# EAGLE board Main_DMB-4773-opto-v2 (EAGLE 6.5.0)
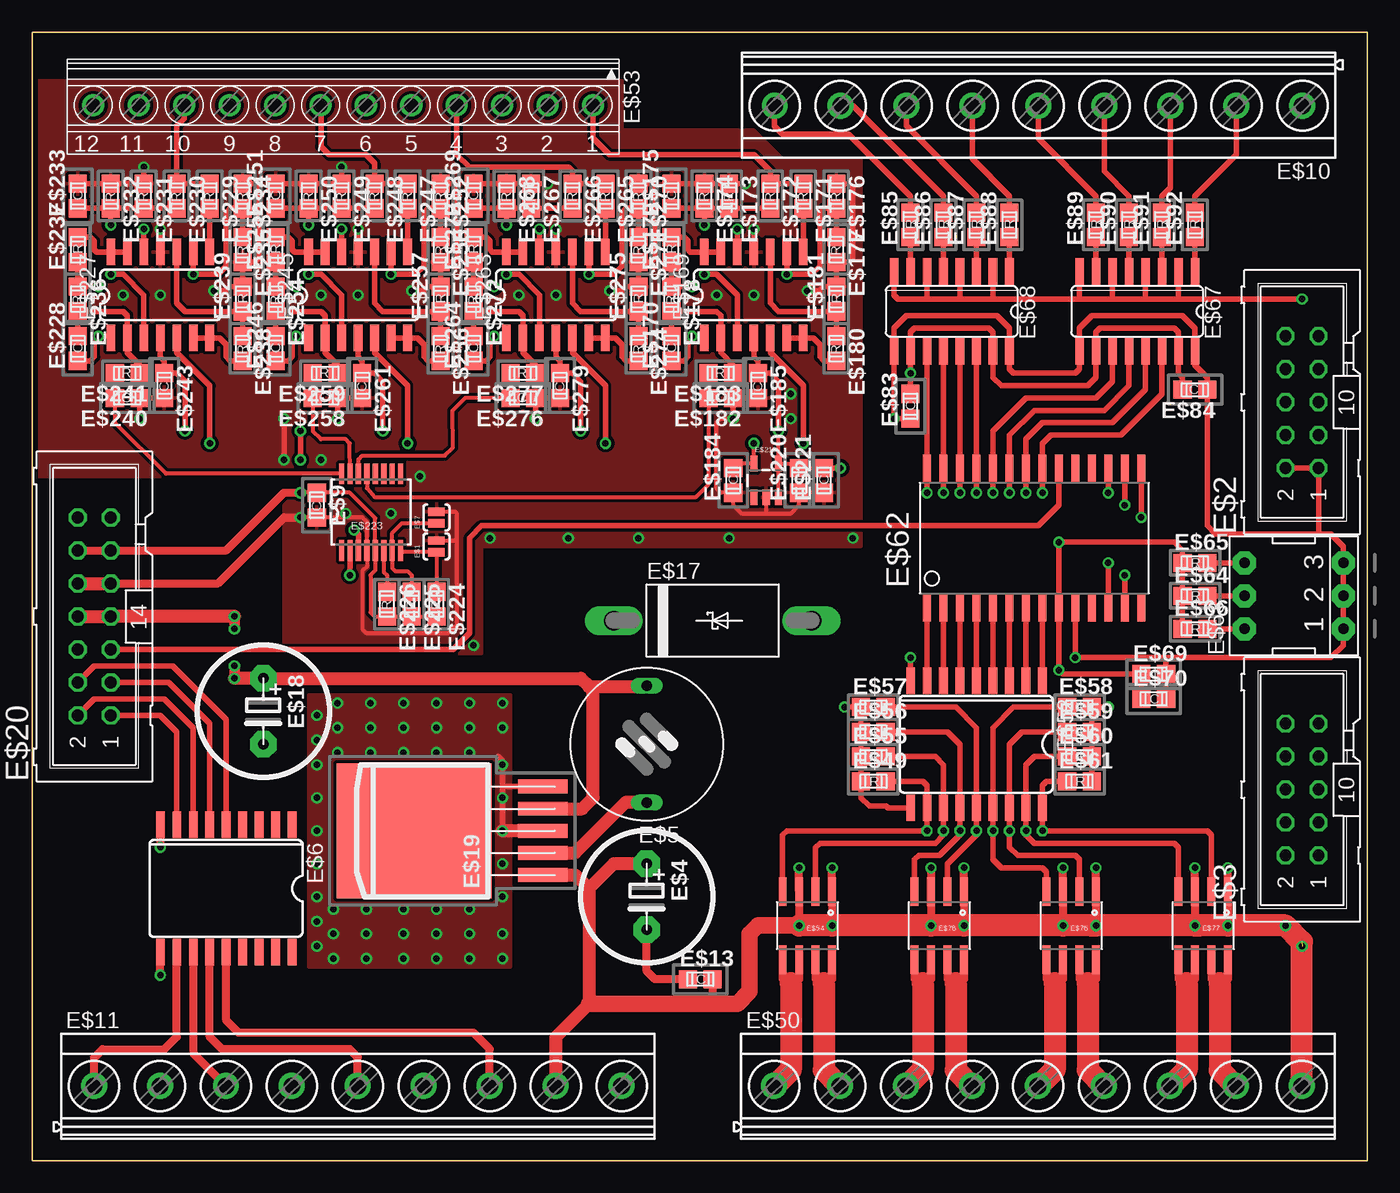
[diagram p0: board, top side]
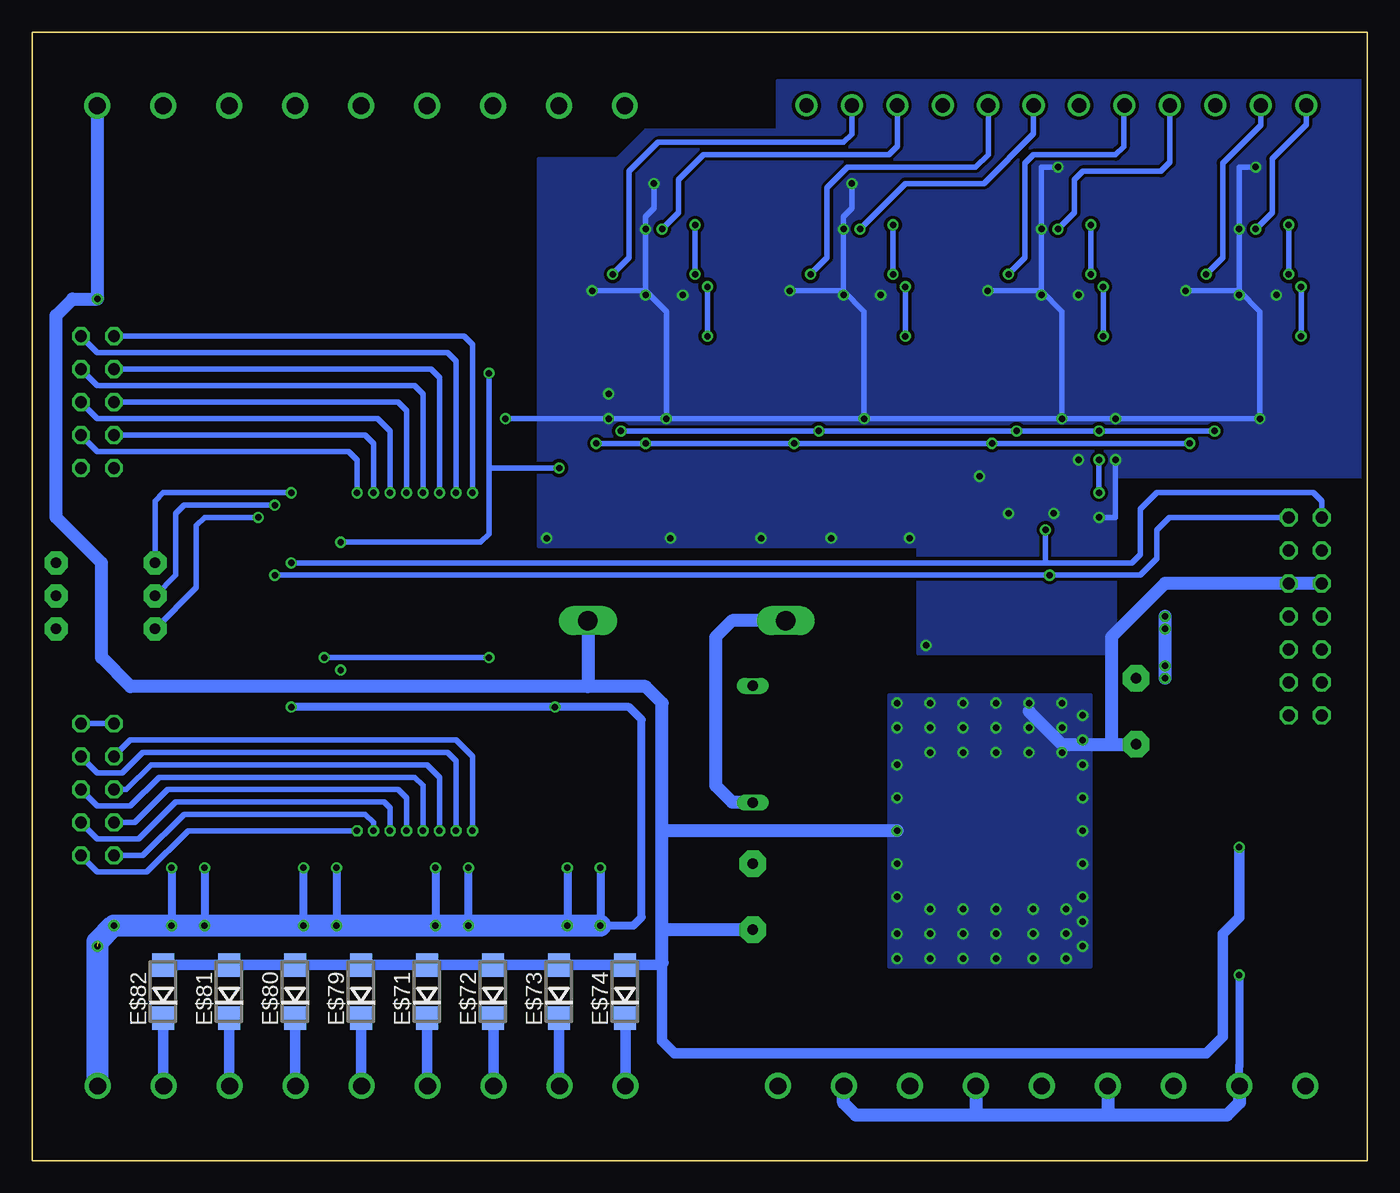
[diagram p1: board, bottom side, seen from below]

Size 102.79 x 86.89 mm. Coordinates in mm from the lower left corner, seen from the top.
Outline: 0,86.89 102.79,86.89 102.79,0 0,0 0,86.89
Copper layers (1*16): Top 0.0356mm / dielectric 1.5011mm / Bottom 0.0356mm
Design rules "LaenPCBOrder": minimum track width 6mil, minimum drill 13mil, track to track 6mil, track to pad 6mil, pad to pad 6mil, via to via 6mil, smd to smd 6mil, copper to edge 15mil, drill to drill 6mil, minimum pad ring 7mil, minimum via ring 7mil, stop-mask expansion 3mil, vias tented up to drill 0mil, thermal gap 10mil

## Footprints (pad centres in the part's own frame; a part is rotated, then mirrored left to right if it is on the bottom)
SJ_2S-NO = smd 0.635 x 1.27: 1 -0.45,0; 2 0.45,0
ML10 = drill 0.914 octagon: 1 -5.08,-1.27; 2 -5.08,1.27; 3 -2.54,-1.27; 4 -2.54,1.27; 5 0,-1.27; 6 0,1.27; 7 2.54,-1.27; 8 2.54,1.27; 9 5.08,-1.27; 10 5.08,1.27
CE02A = drill 0.813 pad 2.032 octagon: + -2.54,0; - 2.54,0
RLB1314 = drill 0.813 long: 1 0,4.496; 2 0,-4.496
SO18L = smd 0.66 x 2.032: 1 -0.635,-4.902; 2 0.635,-4.902; 3 1.905,-4.902; 4 3.175,-4.902; 5 4.445,-4.902; 6 5.715,-4.902; 7 6.985,-4.902; 8 8.255,-4.902; 9 9.525,-4.902; 10 9.525,4.902; 11 8.255,4.902; 12 6.985,4.902; 13 5.715,4.902; 14 4.445,4.902; 15 3.175,4.902; 16 1.905,4.902; 17 0.635,4.902; 18 -0.635,4.902
C0805 = smd 1.397 x 1.397: 1 -0.953,0; 2 0.953,0
MKDSN1,5/9-5,08 = drill 1.3 pad 2: 1 -20.341,0.025; 2 -15.261,0.025; 3 -10.181,0.025; 4 -5.101,0.025; 5 -0.021,0.025; 6 5.059,0.025; 7 10.139,0.025; 8 15.219,0.025; 9 20.299,0.025
DO201T15 = drill 1.499 long: A 7.62,0; C -7.62,0
TO263-5 = smd 1.067 x 3.81: 1 -3.404,0.056; 2 -1.702,0.056; 3 0,0.056; 4 1.702,0.056; 5 3.404,0.056 | smd 10.414 x 11.938: CASE 0,9.975
ML14 = drill 0.914 octagon: 1 -7.62,-1.27; 2 -7.62,1.27; 3 -5.08,-1.27; 4 -5.08,1.27; 5 -2.54,-1.27; 6 -2.54,1.27; 7 0,-1.27; 8 0,1.27; 9 2.54,-1.27; 10 2.54,1.27; 11 5.08,-1.27; 12 5.08,1.27; 13 7.62,-1.27; 14 7.62,1.27
R0805 = smd 1.397 x 1.397: 1 -0.953,0; 2 0.953,0
175317 = drill 1.1 pad 1.7: 1 -13.973,0; 2 -10.473,0; 3 -6.973,0; 4 -3.473,0; 5 0.028,0; 6 3.527,0; 7 7.027,0; 8 10.527,0; 9 14.027,0; 19 17.527,0; 20 21.027,0; 21 24.527,0
SOIC8 = smd 0.61 x 2.21: 1 -1.905,-2.616; 2 -0.635,-2.616; 3 0.635,-2.616; 4 1.905,-2.616; 5 1.905,2.616; 6 0.635,2.616; 7 -0.635,2.616; 8 -1.905,2.616
SO28-3 = smd 0.61 x 2.21: 1 -8.255,-5.315; 2 -6.985,-5.315; 3 -5.715,-5.315; 4 -4.445,-5.315; 5 -3.175,-5.315; 6 -1.905,-5.315; 7 -0.635,-5.315; 8 0.635,-5.315; 9 1.905,-5.315; 10 3.175,-5.315; 11 4.445,-5.315; 12 5.715,-5.315; 13 6.985,-5.315; 14 8.255,-5.315; 15 8.255,5.315; 16 6.985,5.315; 17 5.715,5.315; 18 4.445,5.315; 19 3.175,5.315; 20 1.905,5.315; 21 0.635,5.315; 22 -0.635,5.315; 23 -1.905,5.315; 24 -3.175,5.315; 25 -4.445,5.315; 26 -5.715,5.315; 27 -6.985,5.315; 28 -8.255,5.315
EPG-03-SMALL = drill 0.813 pad 1.778 octagon: 1 -2.54,-3.81; 2 0,-3.81; 3 2.54,-3.81; 4 2.54,3.81; 5 0,3.81; 6 -2.54,3.81
SO16 = smd 0.66 x 2.032: 1 -4.445,-3.073; 2 -3.175,-3.073; 3 -1.905,-3.073; 4 -0.635,-3.073; 5 0.635,-3.073; 6 1.905,-3.073; 7 3.175,-3.073; 8 4.445,-3.073; 9 4.445,3.073; 10 3.175,3.073; 11 1.905,3.073; 12 0.635,3.073; 13 -0.635,3.073; 14 -1.905,3.073; 15 -3.175,3.073; 16 -4.445,3.073
DO214AC = smd 1.8 x 1.7: A 2.05,0; C -2.05,0
SOIC-14 = smd 0.66 x 2.032: 1 -4.445,-3.315; 2 -3.175,-3.315; 3 -1.905,-3.315; 4 -0.635,-3.315; 5 0.635,-3.315; 6 1.905,-3.315; 7 3.175,-3.315; 8 3.175,3.315; 9 1.905,3.315; 10 0.635,3.315; 11 -0.635,3.315; 12 -1.905,3.315; 13 -3.175,3.315; 14 -4.445,3.315
SOT23-5 = smd 0.55 x 1.2: 1 -0.95,-1.3; 2 0,-1.3; 3 0.95,-1.3; 4 0.95,1.3; 5 -0.95,1.3
TSSOP16 = smd 0.4 x 1.6: 1 -2.225,-2.85; 2 -1.575,-2.85; 3 -0.925,-2.85; 4 -0.275,-2.85; 5 0.375,-2.85; 6 1.025,-2.85; 7 1.675,-2.85; 8 2.325,-2.85; 9 2.325,3.05; 10 1.675,3.05; 11 1.025,3.05; 12 0.375,3.05; 13 -0.275,3.05; 14 -0.925,3.05; 15 -1.575,3.05; 16 -2.225,3.05

## Placement (x,y rotation side)
E$1  [SJ_2S-NO]  31.11,47.31 90 top
E$2  [ML10]  97.79,58.42 90 top
E$3  [ML10]  97.79,28.57 90 top
E$4  [CE02A]  47.31,20.32 270 top
E$5  [RLB1314]  47.31,32.07 180 top
E$6  ULN2803  [SO18L]  19.37,20.95 180 top
E$7  [SJ_2S-NO]  31.11,49.53 90 top
E$9  100n  [C0805]  21.91,50.48 270 top
E$10  [MKDSN1,5/9-5,08]  77.47,81.28 180 top
E$11  [MKDSN1,5/9-5,08]  25.08,5.71 0 top
E$13  100n  [C0805]  51.44,13.97 0 top
E$17  [DO201T15]  52.39,41.59 0 top
E$18  [CE02A]  17.78,34.61 270 top
E$19  [TO263-5]  39.37,25.4 90 top
E$20  [ML14]  4.76,41.91 90 top
E$49  10K  [R0805]  64.77,29.21 0 top
E$50  [MKDSN1,5/9-5,08]  77.47,5.71 0 top
E$52  ULN2803  [SO18L]  77.15,32.07 180 top
E$53  [175317]  29.21,81.28 180 top
E$54  [SOIC8]  59.69,18.1 180 top
E$55  10K  [R0805]  64.77,31.11 0 top
E$56  10K  [R0805]  64.77,33.02 0 top
E$57  10K  [R0805]  64.77,34.92 0 top
E$58  10K  [R0805]  80.64,34.92 0 top
E$59  10K  [R0805]  80.64,33.02 0 top
E$60  10K  [R0805]  80.64,31.11 0 top
E$61  10K  [R0805]  80.64,29.21 0 top
E$62  MCP23017  [SO28-3]  77.15,47.94 0 top
E$63  [EPG-03-SMALL]  97.16,43.5 90 top
E$64  10K  [R0805]  89.53,43.5 0 top
E$65  10K  [R0805]  89.53,46.04 0 top
E$66  10K  [R0805]  89.53,40.96 0 top
E$67  ACSL-6400  [SO16]  85.09,65.41 180 top
E$68  ACSL-6400  [SO16]  70.8,65.41 180 top
E$69  100n  [C0805]  86.36,37.47 0 top
E$70  1u  [C0805]  86.36,35.56 0 top
E$71  [DO214AC]  72.39,13.02 90 bottom
E$72  [DO214AC]  67.31,13.02 90 bottom
E$73  [DO214AC]  62.23,13.02 90 bottom
E$74  [DO214AC]  57.15,13.02 90 bottom
E$76  [SOIC8]  80.01,18.1 180 top
E$77  [SOIC8]  90.17,18.1 180 top
E$78  [SOIC8]  69.85,18.1 180 top
E$79  [DO214AC]  77.47,13.02 90 bottom
E$80  [DO214AC]  82.55,13.02 90 bottom
E$81  [DO214AC]  87.63,13.02 90 bottom
E$82  [DO214AC]  92.71,13.02 90 bottom
E$83  100n  [C0805]  67.63,58.1 90 top
E$84  100n  [C0805]  89.53,59.37 180 top
E$85  1.30K  [R0805]  67.63,72.07 90 top
E$86  1.30K  [R0805]  70.17,72.07 90 top
E$87  1.30K  [R0805]  72.71,72.07 90 top
E$88  1.30K  [R0805]  75.25,72.07 90 top
E$89  1.30K  [R0805]  81.92,72.07 90 top
E$90  1.30K  [R0805]  84.45,72.07 90 top
E$91  1.30K  [R0805]  87,72.07 90 top
E$92  1.30K  [R0805]  89.53,72.07 90 top
E$169  [SOIC-14]  56.2,66.67 0 top
E$170  0.1  [C0805]  49.21,62.55 90 top
E$171  1K  [R0805]  59.37,74.3 270 top
E$172  2K  [R0805]  56.83,74.3 270 top
E$173  2K  [R0805]  53.66,74.3 270 top
E$174  39.2K  [R0805]  51.75,74.3 270 top
E$175  0.1  [C0805]  49.21,74.3 90 top
E$176  1.91K  [R0805]  61.91,74.3 270 top
E$177  100  [R0805]  61.91,70.17 270 top
E$178  39.2K  [R0805]  49.21,66.36 270 top
E$179  1K  [R0805]  49.21,70.17 90 top
E$180  26.7K  [R0805]  61.91,62.55 270 top
E$181  1.1K  [R0805]  61.91,66.36 90 top
E$182  4.7n  [C0805]  53.02,58.74 180 top
E$183  51  [R0805]  53.02,60.64 180 top
E$184  0.1  [C0805]  53.98,52.39 90 top
E$185  0.1  [C0805]  55.88,59.69 270 top
E$219  [SOT23-5]  56.52,52.39 0 top
E$220  0.1  [C0805]  59.05,52.39 90 top
E$221  0.1  [C0805]  60.96,52.39 90 top
E$223  AD5316R  [TSSOP16]  26.04,49.85 0 top
E$224  10K  [R0805]  31.11,42.86 270 top
E$225  10K  [R0805]  29.21,42.86 270 top
E$226  10K  [R0805]  27.3,42.86 270 top
E$227  [SOIC-14]  10.48,66.67 0 top
E$228  0.1  [C0805]  3.49,62.55 90 top
E$229  1K  [R0805]  13.65,74.3 270 top
E$230  2K  [R0805]  11.11,74.3 270 top
E$231  2K  [R0805]  8.57,74.3 270 top
E$232  39.2K  [R0805]  6.03,74.3 270 top
E$233  0.1  [C0805]  3.49,74.3 90 top
E$234  1.91K  [R0805]  16.19,74.3 270 top
E$235  100  [R0805]  16.19,70.17 270 top
E$236  39.2K  [R0805]  3.49,66.36 270 top
E$237  1K  [R0805]  3.49,70.17 90 top
E$238  26.7K  [R0805]  16.19,62.55 270 top
E$239  1.1K  [R0805]  16.19,66.36 90 top
E$240  4.7n  [C0805]  7.3,58.74 180 top
E$241  51  [R0805]  7.3,60.64 180 top
E$243  0.1  [C0805]  10.16,59.69 270 top
E$245  [SOIC-14]  25.72,66.67 0 top
E$246  0.1  [C0805]  18.73,62.55 90 top
E$247  1K  [R0805]  28.89,74.3 270 top
E$248  2K  [R0805]  26.35,74.3 270 top
E$249  2K  [R0805]  23.81,74.3 270 top
E$250  39.2K  [R0805]  21.27,74.3 270 top
E$251  0.1  [C0805]  18.73,74.3 90 top
E$252  1.91K  [R0805]  31.43,74.3 270 top
E$253  100  [R0805]  31.43,70.17 270 top
E$254  39.2K  [R0805]  18.73,66.36 270 top
E$255  1K  [R0805]  18.73,70.17 90 top
E$256  26.7K  [R0805]  31.43,62.55 270 top
E$257  1.1K  [R0805]  31.43,66.36 90 top
E$258  4.7n  [C0805]  22.54,58.74 180 top
E$259  51  [R0805]  22.54,60.64 180 top
E$261  0.1  [C0805]  25.4,59.69 270 top
E$263  [SOIC-14]  40.96,66.67 0 top
E$264  0.1  [C0805]  33.97,62.55 90 top
E$265  1K  [R0805]  44.13,74.3 270 top
E$266  2K  [R0805]  41.59,74.3 270 top
E$267  2K  [R0805]  38.42,74.3 270 top
E$268  39.2K  [R0805]  36.51,74.3 270 top
E$269  0.1  [C0805]  33.97,74.3 90 top
E$270  1.91K  [R0805]  46.67,74.3 270 top
E$271  100  [R0805]  46.67,70.17 270 top
E$272  39.2K  [R0805]  33.97,66.36 270 top
E$273  1K  [R0805]  33.97,70.17 90 top
E$274  26.7K  [R0805]  46.67,62.55 270 top
E$275  1.1K  [R0805]  46.67,66.36 90 top
E$276  4.7n  [C0805]  37.78,58.74 180 top
E$277  51  [R0805]  37.78,60.64 180 top
E$279  0.1  [C0805]  40.64,59.69 270 top

## Library data of the parts
E$1 E$7 = SparkFun-Capacitors
E$2 E$3 E$20 = con-harting-ml
E$4 E$9 E$13 E$18 E$49 E$55-E$61 E$64-E$66 E$69 E$70 E$83-E$92 E$170-E$185 E$220 E$221 E$224-E$226 E$228-E$241 E$243 E$246-E$259 E$261 E$264-E$277 E$279 = divers
E$5 = inductors
E$6 E$52 = SparkFun-PowerIC
E$10 E$11 E$50 = con-phoenix-508
E$17 = ref-packages-longpad
E$19 = ic
E$53 = con-phoenix-350
E$54 E$76-E$78 E$223 = SparkFun-AnalogIC
E$62 = burr-brown
E$63 = special
E$67 E$68 = linear
E$71-E$74 E$79-E$82 = ref-packages
E$169 E$219 E$227 E$245 E$263 = SparkFun-DigitalIC

## Nets
+5V: E$5.2 E$18.+ E$19.4 E$20.7 E$20.8
GND: E$1.2 E$2.1 E$2.2 E$4.- E$6.9 E$7.2 E$9.2 E$10.1 E$13.1 E$17.A E$18.- E$19.3 E$19.5 E$20.9 E$20.10 E$52.9 E$62.10 E$63.1 E$63.2 E$63.3 E$67.2 E$67.4 E$67.6 E$67.8 E$67.9 E$67.16 E$68.2 E$68.4 E$68.6 E$68.8 E$68.9 E$68.16 E$69.2 E$70.2 E$71.A E$72.A E$73.A E$74.A E$79.A E$80.A E$81.A E$82.A E$83.1 E$84.1 E$169.11 E$173.1 E$174.1 E$175.2 E$176.1 E$177.2 E$181.2 E$182.1 E$184.1 E$185.2 E$219.2 E$220.1 E$221.1 E$223.4 E$227.11 E$231.1 E$232.1 E$233.2 E$234.1 E$235.2 E$239.2 E$240.1 E$243.2 E$245.11 E$249.1 E$250.1 E$251.2 E$252.1 E$253.2 E$257.2 E$258.1 E$261.2 E$263.11 E$267.1 E$268.1 E$269.2 E$270.1 E$271.2 E$275.2 E$276.1 E$279.2
S$8: E$10.9 E$85.2
S$11: E$53.1 E$171.1 E$172.1
S$26: E$6.11 E$11.1
S$27: E$6.12 E$11.3
S$28: E$6.13 E$11.5
S$29: E$6.14 E$11.7
S$34: E$1.1 E$223.8 E$224.1
S$35: E$6.6 E$20.3
S$36: E$6.5 E$20.4
S$37: E$6.7 E$20.2
S$38: E$6.8 E$20.1
S$39: E$10.8 E$86.2
S$40: E$10.7 E$87.2
S$41: E$10.6 E$88.2
S$42: E$10.5 E$89.2
S$43: E$10.4 E$90.2
S$44: E$10.3 E$91.2
S$45: E$10.2 E$92.2
S$46: E$68.7 E$85.1
S$81: E$4.+ E$6.10 E$11.2 E$11.4 E$11.6 E$11.8 E$13.2 E$19.1 E$49.1 E$50.9 E$52.10 E$54.1 E$54.3 E$55.1 E$56.1 E$57.1 E$58.2 E$59.2 E$60.2 E$61.2 E$76.1 E$76.3 E$77.1 E$77.3 E$78.1 E$78.3
S$83: E$5.1 E$17.C E$19.2
S$99: E$169.8 E$171.2
S$102: E$169.6 E$169.7 E$180.2
S$105: E$53.2 E$169.9 E$176.2 E$177.1
S$108: E$169.1 E$170.1 E$178.1 E$179.1
S$114: E$169.2 E$170.2 E$178.2 E$183.1
S$120: E$169.13 E$169.14 E$179.2
S$126: E$169.10 E$180.1 E$181.1
S$132: E$169.3 E$172.2 E$173.2 E$174.2 E$175.1
S$133: E$53.3 E$169.12
S$134: E$182.2 E$183.2 E$223.13
S$145: E$3.9 E$3.10
S$151: E$169.5 E$184.2 E$219.5 E$227.5 E$245.5 E$263.5
S$152: E$3.8 E$49.2 E$52.11 E$54.4
S$153: E$3.7 E$52.12 E$54.2 E$55.2
S$158: E$3.6 E$52.13 E$56.2 E$78.4
S$159: E$3.5 E$52.14 E$57.2 E$78.2
S$160: E$3.4 E$52.15 E$58.1 E$76.4
S$162: E$3.3 E$52.16 E$59.1 E$76.2
S$163: E$3.2 E$52.17 E$60.1 E$77.4
S$164: E$3.1 E$52.18 E$61.1 E$77.2
S$166: E$52.8 E$62.1
S$167: E$52.7 E$62.2
S$168: E$52.6 E$62.3
S$169: E$52.5 E$62.4
S$170: E$52.4 E$62.5
S$171: E$52.3 E$62.6
S$172: E$52.2 E$62.7
S$173: E$52.1 E$62.8
S$182: E$2.10 E$62.28 E$68.11
S$183: E$2.9 E$62.27 E$68.12
S$184: E$2.8 E$62.26 E$68.13
S$185: E$2.7 E$62.25 E$68.14
S$186: E$2.6 E$62.24 E$67.11
S$187: E$2.5 E$62.23 E$67.12
S$188: E$2.4 E$62.22 E$67.13
S$189: E$2.3 E$62.21 E$67.14
S$190: E$20.5 E$62.20
S$191: E$62.17 E$63.4 E$65.2
S$192: E$62.16 E$63.5 E$64.2
S$193: E$62.15 E$63.6 E$66.2
S$194: E$50.1 E$54.5 E$54.6 E$74.C
S$195: E$53.19 E$229.1 E$230.1
S$196: E$227.8 E$229.2
S$197: E$227.6 E$227.7 E$238.2
S$198: E$53.20 E$227.9 E$234.2 E$235.1
S$199: E$227.1 E$228.1 E$236.1 E$237.1
S$200: E$227.2 E$228.2 E$236.2 E$241.1
S$201: E$227.13 E$227.14 E$237.2
S$202: E$227.10 E$238.1 E$239.1
S$203: E$50.2 E$54.7 E$54.8 E$73.C
S$204: E$227.3 E$230.2 E$231.2 E$232.2 E$233.1
S$205: E$53.21 E$227.12
S$206: E$223.16 E$240.2 E$241.2
S$207: E$50.5 E$76.5 E$76.6 E$79.C
S$208: E$50.6 E$76.7 E$76.8 E$80.C
S$209: E$53.7 E$247.1 E$248.1
S$210: E$245.8 E$247.2
S$211: E$245.6 E$245.7 E$256.2
S$212: E$53.8 E$245.9 E$252.2 E$253.1
S$213: E$245.1 E$246.1 E$254.1 E$255.1
S$214: E$245.2 E$246.2 E$254.2 E$259.1
S$215: E$245.13 E$245.14 E$255.2
S$216: E$245.10 E$256.1 E$257.1
S$217: E$50.7 E$77.5 E$77.6 E$81.C
S$218: E$245.3 E$248.2 E$249.2 E$250.2 E$251.1
S$219: E$53.9 E$245.12
S$220: E$223.15 E$258.2 E$259.2
S$221: E$50.8 E$77.7 E$77.8 E$82.C
S$222: E$50.3 E$72.C E$78.5 E$78.6
S$223: E$53.4 E$265.1 E$266.1
S$224: E$263.8 E$265.2
S$225: E$263.6 E$263.7 E$274.2
S$226: E$53.5 E$263.9 E$270.2 E$271.1
S$227: E$263.1 E$264.1 E$272.1 E$273.1
S$228: E$263.2 E$264.2 E$272.2 E$277.1
S$229: E$263.13 E$263.14 E$273.2
S$230: E$263.10 E$274.1 E$275.1
S$231: E$223.6 E$226.1
S$232: E$263.3 E$266.2 E$267.2 E$268.2 E$269.1
S$233: E$53.6 E$263.12
S$234: E$223.14 E$276.2 E$277.2
S$235: E$7.1 E$223.7 E$225.1
S$236: E$50.4 E$71.C E$78.7 E$78.8
S$240: E$68.5 E$86.1
S$241: E$68.3 E$87.1
S$242: E$68.1 E$88.1
S$243: E$67.7 E$89.1
S$244: E$67.5 E$90.1
S$245: E$67.3 E$91.1
S$246: E$67.1 E$92.1
SCL: E$20.14 E$62.12 E$223.3
SDA: E$20.13 E$62.13 E$223.2
VCC: E$9.1 E$20.11 E$20.12 E$62.9 E$64.1 E$65.1 E$66.1 E$67.10 E$67.15 E$68.10 E$68.15 E$69.1 E$70.1 E$83.2 E$84.2 E$169.4 E$185.1 E$219.3 E$219.4 E$220.2 E$221.2 E$223.5 E$224.2 E$225.2 E$226.2 E$227.4 E$243.1 E$245.4 E$261.1 E$263.4 E$279.1

## Tracks (layer width: path | path; a pad name or v marks a point on that pad's centre or on a via)
+5V  (via drill 0.5)
  Top 0.813: v15.56,37.15 v15.56,38.1 | v15.56,40.96 v15.56,41.91
  Top 1.016: E$20.8 E$20.7 v15.56,41.91 | v15.56,37.15 E$18.+ 42.23,37.15 42.86,36.51 | 42.86,36.51 47.26,36.51 E$5.2 | E$19.4 42.34,27.1 43.18,27.94 43.18,36.2 42.86,36.51
  Bottom 1.016: v15.56,41.91 v15.56,40.96 v15.56,38.1 v15.56,37.15
GND  (via drill 0.5)
  Top 0.305: E$221.1 E$220.1 | E$219.2 56.52,49.85 | 56.52,49.85 58.42,49.85 59.05,50.48 E$220.1 | E$220.1 | 56.52,49.85 54.61,49.85 53.98,50.48 E$184.1 53.02,51.44 52.7,51.75 52.7,56.83 53.02,57.15 v53.98,57.15 | v20.64,49.53 E$9.2 25.4,49.53 25.76,49.17 E$223.4 25.76,45.76 25.4,45.4 25.4,40.96 25.72,40.64 32.07,40.64 32.7,41.27 32.7,47.94 | 32.7,47.94 32.7,49.85 32.57,49.98 E$7.2 | E$1.2 32.52,47.76 32.7,47.94
  Top 0.406: E$251.2 E$250.1 E$249.1 v23.81,76.52 | v29.21,66.99 30.16,66.99 30.48,67.31 E$257.2 E$253.2 32.38,69.22 32.7,69.53 32.7,74.93 32.38,75.25 E$252.1 | v23.81,76.52 | E$245.11 v25.08,71.75 | v23.5,57.15 E$258.1 E$261.2 | E$269.2 E$268.1 E$267.1 39.05,75.25 v39.69,75.25 | v44.45,66.99 45.4,66.99 45.72,67.31 E$275.2 E$271.2 47.62,69.22 47.94,69.53 47.94,74.93 47.62,75.25 E$270.1 | E$263.11 v40.32,71.75 | v38.73,57.15 E$276.1 E$279.2 | E$175.2 E$174.1 E$173.1 54.29,75.25 v54.93,75.25 | v59.69,66.99 60.64,66.99 60.96,67.31 E$181.2 E$177.2 62.87,69.22 63.18,69.53 63.18,74.93 62.87,75.25 E$176.1 | E$169.11 v55.56,71.75 | v53.98,57.15 E$182.1 E$185.2 | E$233.2 E$232.1 E$231.1 v8.57,76.52 | v13.97,66.99 14.92,66.99 15.24,67.31 E$239.2 E$235.2 17.14,69.22 17.46,69.53 17.46,74.93 17.14,75.25 E$234.1 | v8.57,76.52 | E$227.11 v9.84,71.75 | v8.26,57.15 E$240.1 E$243.2 | v19.37,53.98 v19.37,57.15 | E$62.10 v80.33,38.73 87.31,38.73 | E$52.9 v67.63,38.73 | 87.31,38.73 100.01,38.73 100.97,39.69 E$63.1 E$63.2 E$63.3 100.97,47.31 100.01,48.26 99.06,48.26 | 87.31,38.73 E$69.2 E$70.2 | E$83.1 v66.36,57.15 E$68.9 66.36,64.14 67.31,65.09 74.3,65.09 75.25,64.14 E$68.16 75.25,60.96 75.56,60.64 80.33,60.64 80.64,60.96 E$67.9 80.64,64.14 81.6,65.09 88.58,65.09 89.53,64.14 E$67.16 89.53,61.28 90.49,60.33 E$84.1 90.49,48.9 91.12,48.26 99.06,48.26 | E$2.2 E$2.1 99.06,48.26 | 35.88,31.11 36.2,30.8 36.2,28.89 | 36.2,28.89 v36.2,25.4 | E$19.5 36.28,28.8 36.2,28.89 | E$68.8 66.36,66.67 66.67,66.36 68.9,66.36 | E$68.6 68.9,66.36 | 68.9,66.36 71.44,66.36 | E$68.4 71.44,66.36 | 71.44,66.36 73.98,66.36 | E$68.2 73.98,66.36
  Top 0.406: 73.98,66.36 80.64,66.36 | E$67.8 80.64,66.36 | 80.64,66.36 83.19,66.36 | E$67.6 83.19,66.36 | 83.19,66.36 85.72,66.36 | E$67.4 85.72,66.36 | 85.72,66.36 88.27,66.36 | E$67.2 88.27,66.36 | 88.27,66.36 v97.79,66.36 | E$221.1
  Top 0.61: E$20.9 14.29,44.45 19.37,49.53 v20.64,49.53 | E$6.9 v9.84,24.13 | E$13.1 50.16,13.97 47.94,13.97 47.31,14.61 E$4.-
  Top 1.016: E$20.10 E$20.9 | E$19.3 v36.2,25.4
  Bottom 0.406: v23.81,76.52 25.08,76.52 v25.08,71.75 25.08,66.99 | 25.08,66.99 v29.21,66.99 | v23.5,57.15 23.5,65.41 25.08,66.99 | v39.69,75.25 39.69,73.34 40.32,72.71 v40.32,71.75 40.32,66.99 | 40.32,66.99 v44.45,66.99 | v38.73,57.15 38.73,65.41 40.32,66.99 | v23.5,57.15 v38.73,57.15 | v54.93,75.25 54.93,73.34 55.56,72.71 v55.56,71.75 55.56,66.99 | 55.56,66.99 v59.69,66.99 | v53.98,57.15 53.98,65.41 55.56,66.99 | v38.73,57.15 v53.98,57.15 | v8.57,76.52 9.84,76.52 v9.84,71.75 9.84,66.99 | 9.84,66.99 v13.97,66.99 | 9.84,66.99 8.26,65.41 v8.26,57.15 v19.37,57.15 v23.5,57.15 | v20.64,49.53 19.37,49.53 v19.37,53.98 | v80.33,38.73 v67.63,38.73 | v53.98,57.15 v66.36,57.15
  Bottom 0.813: 97.81,66.38 v97.79,66.36 | E$82.A E$81.A E$80.A E$79.A E$71.A E$72.A E$73.A E$74.A 54.47,15.07 54.29,15.24 54.29,9.21 53.34,8.26 12.38,8.26 11.11,9.53 11.11,17.46 9.84,18.73 v9.84,24.13
  Bottom 1.016: 26.04,34.61 23.5,32.07 19.68,32.07 | 19.68,32.07 E$18.- | 19.68,32.07 19.68,40.32 15.56,44.45 E$20.9 E$20.10 | E$10.1 97.81,66.38 | v97.79,66.36 99.69,66.36 100.97,65.09 100.97,49.53 97.47,46.04 97.47,38.73 95.25,36.51 60.01,36.51 | 60.01,36.51 55.56,36.51 54.29,35.24 54.29,25.4 | 54.29,15.24 54.29,17.78 | 54.29,17.78 54.29,25.4 | E$4.- 54.29,17.78 | E$17.A 60.01,36.51 | v36.2,25.4 54.29,25.4
  other vias: 6.99,66.67 22.23,66.67 37.47,66.67 52.7,66.67 58.42,59.05 58.42,57.15 22.23,53.98 29.84,52.7 27.62,49.85 24.13,49.85 9.84,66.67 25.08,66.67 40.32,66.67 55.56,66.67 33.97,39.69 35.24,47.94 63.18,47.94 53.66,47.94 46.67,47.94 41.27,47.94 36.2,33.34 36.2,27.94 36.2,22.86 33.66,19.37 31.11,17.46 31.11,19.37 28.57,19.37 23.5,33.34 31.11,35.24 28.57,31.43 31.11,31.43 33.66,35.24 25.72,19.37 28.57,15.56 23.18,15.56 25.72,15.56 25.72,17.46 23.18,17.46 23.18,19.37 26.04,31.43 28.57,35.24 26.04,33.34 23.5,31.43 21.91,32.38 36.2,15.56 36.2,20.32 21.91,25.4 21.91,22.86 21.91,27.94 21.91,30.48 21.91,34.29 23.5,35.24 36.2,30.48 31.11,15.56 26.04,35.24 33.66,31.43 28.57,33.34 31.11,33.34 33.66,33.34 36.2,35.24 36.2,17.46 33.66,17.46 33.66,15.56 28.57,17.46 21.91,20.32 21.91,18.41 21.91,16.51
  pour Top (isolate 0.254): 0,83.19 45.4,83.19 45.4,79.38 55.56,79.38 57.78,77.15 63.82,77.15 63.82,47.31 34.61,47.31 34.61,39.05 19.37,39.05 19.37,52.7 0,52.7
  pour Bottom (isolate 0.254): 0,83.19 45.4,83.19 45.4,79.38 55.56,79.38 57.78,77.15 63.82,77.15 63.82,47.31 34.61,47.31 34.61,39.05 19.37,39.05 19.37,52.7 0,52.7
  pour Top (isolate 0.254): 36.83,14.92 21.27,14.92 21.27,35.88 36.83,35.88
  pour Bottom (isolate 0.254): 36.83,14.92 21.27,14.92 21.27,35.88 36.83,35.88
S$8
  Top 0.406: E$10.9 57.17,79.67 57.78,79.06 62.87,79.06 67.63,74.3 E$85.2
S$11
  Top 0.406: E$171.1 | E$171.1 | E$171.1 E$172.1 56.83,76.2 55.56,77.47 44.45,77.47 43.18,78.74 E$53.1
S$26
  Top 0.61: E$6.11 11.11,9.53 10.16,8.57 5.4,8.57 4.74,7.92 E$11.1
S$27
  Top 0.61: E$6.12 12.38,8.26 13.63,7.01 E$11.3
S$28
  Top 0.61: E$11.5 25.06,7.96 24.45,8.57 14.61,8.57 13.65,9.53 E$6.13
S$29
  Top 0.61: E$11.7 35.22,8.59 33.97,9.84 15.88,9.84 14.92,10.79 E$6.14
S$34
  Top 0.305: E$223.8 28.5,46.86 E$1.1 E$224.1
  Top 0.406: E$224.1
S$35
  Top 0.406: E$20.3 10.48,36.83 13.65,33.66 E$6.6
S$36
  Top 0.406: E$20.4 4.76,38.1 10.79,38.1 14.92,33.97 E$6.5
S$37
  Top 0.406: E$6.7 12.38,33.34 10.16,35.56 4.76,35.56 E$20.2
S$38
  Top 0.406: E$6.8 11.11,33.02 9.84,34.29 E$20.1
S$39
  Top 0.406: E$10.8 63.2,81.26 70.17,74.3 E$86.2
S$40
  Top 0.406: E$87.2 72.71,74.3 67.31,79.69 67.31,81.23 E$10.7
S$41
  Top 0.406: E$88.2 75.25,74.3 72.39,77.15 72.39,81.23 E$10.6
S$42
  Top 0.406: E$89.2 81.92,74.3 77.47,78.74 77.47,81.23 E$10.5
S$43
  Top 0.406: E$90.2 84.45,74.3 82.55,76.2 82.55,81.23 E$10.4
S$44
  Top 0.406: E$91.2 87,74.3 87.63,74.93 87.63,81.23 E$10.3
S$45
  Top 0.406: E$92.2 89.53,74.3 92.71,77.47 92.71,81.23 E$10.2
S$46
  Top 0.406: E$68.7 E$85.1
S$81  (via drill 0.5)  (1 unrouted)
  Top 0.406: E$52.10 65.9,27.16 65.72,27.3 64.45,27.3 63.82,27.94 E$49.1 E$55.1 E$56.1 E$57.1 v62.55,34.92 | E$61.2 E$60.2 E$59.2 E$58.2 v82.87,34.92
  Top 0.61: v59.05,18.1 E$54.3 v59.05,22.54 | v61.59,18.1 E$54.1 v61.59,22.54 | v69.22,18.1 E$78.3 v69.22,22.54 | v71.75,18.1 E$78.1 v71.75,22.54 | v79.38,18.1 E$76.3 v79.38,22.54 | 81.6,18.1 81.92,18.41 E$76.1 v81.92,22.54 | 89.85,18.1 89.53,18.41 E$77.3 v89.53,22.54 | v92.08,18.1 E$77.1 v92.08,22.54 | E$11.8 40.3,6.01 40.32,6.03 | v9.84,14.29 E$6.10 | E$13.2 52.39,12.38 52.7,12.06
  Top 1.016: 40.32,6.03 40.32,9.53 42.86,12.06 42.86,20.95 | E$19.1 41.82,22 42.86,20.95 | E$4.+ 44.77,22.86 42.86,20.95
  Top 1.27: 89.85,18.1 v89.53,18.1 | v81.92,18.1 81.6,18.1 | 42.86,12.06 52.7,12.06 54.29,12.06 55.24,13.02 55.24,17.46 55.88,18.1 v59.05,18.1
  Top 1.676: E$50.9 97.77,16.85 v96.52,18.1 v92.08,18.1 89.85,18.1 | v89.53,18.1 v81.92,18.1 | 81.6,18.1 v79.38,18.1 v71.75,18.1 v69.22,18.1 v61.59,18.1 v59.05,18.1
  Bottom 0.61: v59.05,22.54 v59.05,18.1 56.52,18.1 55.88,18.73 55.88,33.97 56.83,34.92 v62.55,34.92 v82.87,34.92 | v61.59,22.54 v61.59,18.1 | v81.92,18.1 v81.92,22.54 | v79.38,22.54 v79.38,18.1 | v69.22,18.1 v69.22,22.54 | v71.75,22.54 v71.75,18.1 | v89.53,22.54 v89.53,18.1 | v92.08,22.54 v92.08,18.1 | 30.14,3.51 30.16,3.49 | 19.98,3.51 20,3.49 | v9.84,14.29 9.84,7.3 9.82,7.28 E$11.2 | E$11.8 40.32,5.71 40.32,5.72 E$11.8
  Bottom 1.016: 40.32,5.71 40.32,4.45 39.37,3.49 30.16,3.49 20,3.49 10.79,3.49 9.82,4.47 E$11.2 | E$11.6 30.14,3.51 | E$11.4 19.98,3.51
  Bottom 1.676: E$50.9 97.77,16.85 v96.52,18.1 v92.08,18.1 v89.53,18.1 v81.92,18.1 v79.38,18.1 v71.75,18.1 v69.22,18.1 v61.59,18.1 v59.05,18.1
  other vias: 97.79,16.51
S$83
  Top 1.016: E$19.2 41.8,23.7 45.72,27.62 47.26,27.62 E$5.1
  Bottom 1.016: E$17.C 48.9,41.59 50.16,40.32 50.16,28.89 48.9,27.62 47.36,27.62 E$5.1
S$99
  Top 0.406: E$171.2 E$169.8
S$102
  Top 0.406: E$169.6 E$169.7 60.15,63.36 60.64,62.87 60.64,61.91 60.96,61.59 E$180.2
S$105  (via drill 0.5)
  Top 0.406: E$169.9 v58.1,68.26 60.01,68.26 60.64,68.9 60.64,73.03 60.96,73.34 E$176.2 E$177.1
  Bottom 0.406: E$53.2 39.68,79.06 40.32,78.42 54.61,78.42 56.83,76.2 56.83,69.53 v58.1,68.26
S$108  (via drill 0.5)
  Top 0.406: E$169.1 51.61,63.5 v50.8,63.5 50.48,63.18 50.48,61.91 50.16,61.59 E$170.1 | E$179.1 E$178.1 v50.8,67.31
  Bottom 0.406: v50.8,67.31 v50.8,63.5
S$114
  Top 0.406: E$170.2 E$178.2 52.7,65.41 53.02,65.09 E$169.2 53.02,62.23 53.98,61.28 E$183.1
S$120
  Top 0.406: E$179.2 50.16,71.12 50.48,70.8 50.48,70.17 50.66,69.99 E$169.14 | E$169.13 E$169.14 | E$169.14 51.75,70.8
S$126
  Top 0.406: E$180.1 E$181.1 57.47,65.41 56.83,66.04 E$169.10
S$132  (via drill 0.5)
  Top 0.406: E$175.1 E$174.2 | E$169.3 54.29,66.67 52.7,68.26 v51.75,68.26 | v51.75,72.07 E$174.2 | E$174.2 E$173.2 E$172.2
  Bottom 0.406: v51.75,68.26 v51.75,72.07
S$133  (via drill 0.5)
  Top 0.406: E$169.12 v54.29,71.75
  Bottom 0.406: v54.29,71.75 53.02,73.03 53.02,75.56 51.12,77.47 36.83,77.47 36.18,78.12 E$53.3
S$134
  Top 0.305: E$182.2 52.07,52.07 51.12,51.12 26.35,51.12 25.76,51.8 E$223.13
  Top 0.406: E$183.2 E$182.2
S$145
  Bottom 0.406: E$3.9 E$3.10
S$151  (via drill 0.5)
  Top 0.305: E$184.2 54.32,53.69 E$219.5 v55.56,55.24
  Top 0.406: v59.37,55.24 59.37,59.69 56.83,62.23 E$169.5 | v44.13,55.24 44.13,59.69 41.59,62.23 E$263.5 | v28.89,55.24 28.89,59.69 26.35,62.23 E$245.5 | v13.65,55.24 13.65,59.69 11.11,62.23 E$227.5
  Bottom 0.305: 14.61,55.24 v13.65,55.24
  Bottom 0.406: v59.37,55.24 v55.56,55.24 v44.13,55.24 v28.89,55.24 v13.65,55.24
S$152  (via drill 0.5)
  Top 0.406: E$49.2 68.58,29.21 68.9,28.89 E$52.11 v68.9,25.4 58.1,25.4 57.78,25.08 E$54.4
  Bottom 0.406: E$3.8 95.25,32.38 70.17,32.38 68.9,31.11 v68.9,25.4
S$153  (via drill 0.5)
  Top 0.406: E$55.2 69.53,31.11 70.17,30.48 E$52.12 v70.17,25.4 70.17,25.08 69.53,24.45 60.64,24.45 60.33,24.13 E$54.2
  Bottom 0.406: E$3.7 97.79,29.84 95.89,29.84 94.3,31.43 70.8,31.43 70.17,30.8 v70.17,25.4
S$158  (via drill 0.5)
  Top 0.406: E$56.2 70.48,33.02 71.44,32.07 E$52.13 v71.44,25.4 71.44,25.08 69.85,23.5 68.26,23.5 67.94,23.18 E$78.4
  Bottom 0.406: E$3.6 95.57,28.57 93.66,30.48 72.39,30.48 71.44,29.53 v71.44,25.4
S$159  (via drill 0.5)
  Top 0.406: E$57.2 71.12,34.92 72.71,33.34 E$52.14 v72.71,25.4 72.71,25.08 70.48,22.86 E$78.2
  Bottom 0.406: E$3.5 97.79,27.3 95.25,27.3 93.03,29.53 73.34,29.53 72.71,28.89 v72.71,25.4
S$160  (via drill 0.5)
  Top 0.406: E$58.1 75.56,34.92 73.98,33.34 E$52.15 v73.98,25.4 73.98,23.18 74.61,22.54 77.79,22.54 78.11,22.23 E$76.4
  Bottom 0.406: E$3.4 94.93,26.04 92.39,28.57 74.61,28.57 73.98,27.94 v73.98,25.4
S$162  (via drill 0.5)
  Top 0.406: E$59.1 76.2,33.02 75.25,32.07 E$52.16 v75.25,25.4 75.25,24.13 75.88,23.5 80.33,23.5 80.64,23.18 E$76.2 | E$59.1
  Bottom 0.406: E$3.3 97.79,24.77 94.61,24.77 91.76,27.62 75.7,27.62 E$52.16 v75.25,25.4
S$163  (via drill 0.5)
  Top 0.406: E$60.1 77.15,31.11 76.52,30.48 E$52.17 v76.52,25.4 76.52,25.08 77.15,24.45 87.95,24.45 88.27,24.13 E$77.4
  Bottom 0.406: E$3.2 94.3,23.5 91.12,26.67 77.15,26.67 76.52,26.04 v76.52,25.4
S$164  (via drill 0.5)
  Top 0.406: E$61.1 78.11,29.21 77.79,28.89 E$52.18 v77.79,25.4 90.49,25.4 90.81,25.08 E$77.2 | E$61.1
  Bottom 0.406: E$3.1 97.79,22.23 93.98,22.23 90.81,25.4 v77.79,25.4
S$166
  Top 0.406: E$52.8 E$62.1
S$167
  Top 0.406: E$62.2 E$52.7
S$168
  Top 0.406: E$52.6 E$62.3
S$169
  Top 0.406: E$62.4 E$52.5
S$170
  Top 0.406: E$52.4 E$62.5
S$171
  Top 0.406: E$62.6 E$52.3
S$172
  Top 0.406: E$52.2 E$62.7
S$173
  Top 0.406: E$62.8 E$52.1
S$182  (via drill 0.5)
  Top 0.406: E$68.11 68.9,53.34 E$62.28 v68.9,51.44
  Bottom 0.406: E$2.10 69.53,63.5 68.9,62.87 v68.9,51.44
S$183  (via drill 0.5)
  Top 0.406: E$68.12 70.17,53.66 E$62.27 v70.17,51.44
  Bottom 0.406: E$2.9 97.79,62.23 70.8,62.23 70.17,61.59 v70.17,51.44
S$184  (via drill 0.5)
  Top 0.406: E$68.13 71.44,53.34 E$62.26 v71.44,51.44
  Bottom 0.406: E$2.8 72.07,60.96 71.44,60.33 v71.44,51.44
S$185  (via drill 0.5)
  Top 0.406: E$68.14 72.71,53.34 E$62.25 v72.71,51.44
  Bottom 0.406: E$2.7 97.79,59.69 73.34,59.69 72.71,59.05 v72.71,51.44
S$186  (via drill 0.5)
  Top 0.406: E$67.11 83.19,60.01 81.92,58.74 76.52,58.74 73.98,56.2 73.98,53.34 E$62.24 v73.98,51.44
  Bottom 0.406: E$2.6 74.61,58.42 73.98,57.78 v73.98,51.44
S$187  (via drill 0.5)
  Top 0.406: E$67.12 84.45,59.69 82.55,57.78 77.15,57.78 75.25,55.88 E$62.23 v75.25,51.44
  Bottom 0.406: E$2.5 97.79,57.15 76.2,57.15 75.25,56.2 v75.25,51.44
S$188  (via drill 0.5)
  Top 0.406: E$67.13 85.72,59.37 83.19,56.83 77.79,56.83 76.52,55.56 76.52,53.34 E$62.22 v76.52,51.44
  Bottom 0.406: E$2.4 77.15,55.88 76.52,55.24 v76.52,51.44
S$189  (via drill 0.5)
  Top 0.406: E$67.14 87,59.05 83.82,55.88 78.42,55.88 77.79,55.24 77.79,53.34 E$62.21 v77.79,51.44
  Bottom 0.406: E$2.3 97.79,54.61 78.42,54.61 77.79,53.98 v77.79,51.44
S$190
  Top 0.406: E$62.20 79.06,50.48 77.47,48.9 34.61,48.9 33.66,47.94 33.66,40.64 32.38,39.37 E$20.5
S$191  (via drill 0.5)
  Top 0.406: E$65.2 E$63.4 | E$62.17 v82.87,51.44
  Bottom 0.406: E$63.4 93.34,50.8 92.71,51.44 v82.87,51.44
S$192  (via drill 0.5)
  Top 0.406: E$63.5 E$64.2 | E$62.16 v84.14,50.48
  Bottom 0.406: E$63.5 91.76,45.09 91.76,49.85 91.12,50.48 v84.14,50.48
S$193  (via drill 0.5)
  Top 0.406: E$66.2 E$63.6 | E$62.15 v85.41,49.53
  Bottom 0.406: E$63.6 90.17,44.13 90.17,48.9 89.53,49.53 v85.41,49.53
S$194
  Top 0.61: E$54.5 57.78,13.97 58.42,13.65 | 57.15,5.76 E$50.1 | E$54.6 59.05,13.97 58.74,13.65 58.42,6.99
  Top 1.676: 58.42,13.65 58.42,6.99 57.15,5.71 57.15,5.76
  Bottom 0.813: E$50.1 57.13,10.95 E$74.C
S$195
  Top 0.406: E$229.1 | E$229.1 E$230.1 11.11,79.69 11.68,80.26 E$53.19 | E$229.1
S$196
  Top 0.406: E$229.2 E$227.8
S$197
  Top 0.406: E$227.6 E$227.7 14.43,63.36 14.92,62.87 14.92,61.91 15.24,61.59 E$238.2
S$198  (via drill 0.5)
  Top 0.406: E$227.9 v12.38,68.26 14.29,68.26 14.92,68.9 14.92,73.03 15.24,73.34 E$234.2 E$235.1
  Bottom 0.406: v12.38,68.26 11.11,69.53 11.11,76.83 8.18,79.77 E$53.20
S$199  (via drill 0.5)
  Top 0.406: E$227.1 5.89,63.5 v5.08,63.5 4.76,63.18 4.76,61.91 4.45,61.59 E$228.1 | E$237.1 E$236.1 v5.08,67.31
  Bottom 0.406: v5.08,67.31 v5.08,63.5
S$200
  Top 0.406: E$228.2 E$236.2 6.99,65.41 7.3,65.09 E$227.2 7.3,62.23 8.26,61.28 E$241.1
S$201
  Top 0.406: E$237.2 4.45,71.12 4.76,70.8 4.76,70.17 4.94,69.99 E$227.14 | E$227.13 E$227.14 | E$227.14 6.03,70.8
S$202
  Top 0.406: E$238.1 E$239.1 11.75,65.41 11.11,66.04 E$227.10
S$203
  Top 0.61: E$54.8 61.59,13.97 60.96,13.65 60.33,13.97 E$54.7
  Top 1.676: 60.96,13.65 60.96,6.99 E$50.2
  Bottom 0.813: E$73.C 62.23,5.76 E$50.2
S$204  (via drill 0.5)
  Top 0.406: E$233.1 E$232.2 | E$227.3 8.57,66.67 6.99,68.26 v6.03,68.26 | v6.03,72.07 E$232.2 | E$232.2 E$231.2 E$230.2
  Bottom 0.406: v6.03,68.26 v6.03,72.07
S$205  (via drill 0.5)
  Top 0.406: E$227.12 v8.57,71.75
  Bottom 0.406: v8.57,71.75 7.3,73.03 7.3,77.15 4.68,79.77 E$53.21
S$206
  Top 0.305: E$240.2 6.35,56.83 10.29,52.9 E$223.16
  Top 0.406: E$241.2 E$240.2
S$207
  Top 0.61: E$76.5 78.11,13.97 78.74,13.65 | E$76.6 79.38,13.97 79.06,13.65 78.74,6.99
  Top 1.676: 78.74,13.65 78.74,6.99 77.45,5.69 E$50.5
  Bottom 0.813: E$79.C 77.47,5.76 E$50.5
S$208
  Top 0.61: E$76.8 81.92,13.97 81.28,13.65 80.64,13.97 E$76.7
  Top 1.676: 81.28,13.65 81.28,6.99 E$50.6
  Bottom 0.813: E$80.C 82.55,5.76 E$50.6
S$209
  Top 0.406: E$247.1 | E$247.1 E$248.1 | E$247.1 | E$53.7 22.18,81 22.23,80.96 22.23,78.11 22.86,77.47 25.72,77.47 26.35,76.83 E$248.1 | E$248.1
S$210
  Top 0.406: E$247.2 E$245.8
S$211
  Top 0.406: E$245.6 E$245.7 29.67,63.36 30.16,62.87 30.16,61.91 30.48,61.59 E$256.2
S$212  (via drill 0.5)
  Top 0.406: E$245.9 v27.62,68.26 29.53,68.26 30.16,68.9 30.16,73.03 30.48,73.34 E$252.2 E$253.1
  Bottom 0.406: E$53.8 18.68,80.69 18.73,80.64 18.73,78.11 19.37,77.47 25.72,77.47 26.35,76.83 26.35,69.53 v27.62,68.26
S$213  (via drill 0.5)
  Top 0.406: E$245.1 21.13,63.5 v20.32,63.5 20,63.18 20,61.91 19.68,61.59 E$246.1 | E$255.1 E$254.1 v20.32,67.31
  Bottom 0.406: v20.32,67.31 v20.32,63.5
S$214
  Top 0.406: E$246.2 E$254.2 22.23,65.41 22.54,65.09 E$245.2 22.54,62.23 23.5,61.28 E$259.1
S$215
  Top 0.406: E$255.2 19.68,71.12 20,70.8 20,70.17 20.18,69.99 E$245.14 | E$245.13 E$245.14 | E$245.14 21.27,70.8
S$216
  Top 0.406: E$256.1 E$257.1 26.99,65.41 26.35,66.04 E$245.10
S$217
  Top 0.61: E$77.5 88.27,13.97 88.9,13.65 | E$77.6 89.53,13.97 89.22,13.65 88.9,6.99
  Top 1.676: 88.9,13.65 88.9,6.99 87.61,5.69 E$50.7
  Bottom 0.813: E$81.C 87.63,5.76 E$50.7
S$218  (via drill 0.5)
  Top 0.406: E$251.1 E$250.2 | E$245.3 23.81,66.67 22.23,68.26 v21.27,68.26 | v21.27,72.07 E$250.2 | E$250.2 E$249.2 E$248.2
  Bottom 0.406: v21.27,68.26 v21.27,72.07
S$219  (via drill 0.5)
  Top 0.406: E$245.12 v23.81,71.75
  Bottom 0.406: v23.81,71.75 22.54,73.03 22.54,75.56 21.91,76.2 15.88,76.2 15.18,76.89 E$53.9
S$220
  Top 0.305: E$258.2 21.59,56.2 22.23,55.56 24.13,55.56 24.43,55.23 E$223.15
  Top 0.406: E$259.2 E$258.2
S$221
  Top 0.61: E$77.8 92.08,13.97 91.44,13.65 90.81,13.97 E$77.7
  Top 1.676: 91.44,13.65 91.44,6.99 E$50.8
  Bottom 0.813: E$82.C 92.71,5.76 E$50.8
S$222
  Top 0.61: E$78.5 67.94,13.97 68.58,13.65 | E$78.6 69.22,13.97 68.9,13.65 68.58,6.99
  Top 1.676: 68.58,13.65 68.58,6.99 67.29,5.69 E$50.3
  Bottom 0.813: E$50.3 67.29,10.95 E$72.C
S$223
  Top 0.406: E$265.1 | E$265.1 E$266.1 41.59,76.2 41.27,76.52 33.66,76.52 32.68,77.49 E$53.4 | E$265.1
S$224
  Top 0.406: E$265.2 E$263.8
S$225
  Top 0.406: E$263.6 E$263.7 44.91,63.36 45.4,62.87 45.4,61.91 45.72,61.59 E$274.2
S$226  (via drill 0.5)
  Top 0.406: E$263.9 v42.86,68.26 44.77,68.26 45.4,68.9 45.4,73.03 45.72,73.34 E$270.2 E$271.1
  Bottom 0.406: v42.86,68.26 41.59,69.53 41.59,74.93 40.01,76.52 30.16,76.52 29.18,77.5 E$53.5
S$227  (via drill 0.5)
  Top 0.406: E$263.1 36.37,63.5 v35.56,63.5 35.24,63.18 35.24,61.91 34.92,61.59 E$264.1 | E$273.1 E$272.1 v35.56,67.31
  Bottom 0.406: v35.56,67.31 v35.56,63.5
S$228
  Top 0.406: E$264.2 E$272.2 37.47,65.41 37.78,65.09 E$263.2 37.78,62.23 38.73,61.28 E$277.1
S$229
  Top 0.406: E$273.2 34.92,71.12 35.24,70.8 35.24,70.17 35.42,69.99 E$263.14 | E$263.13 E$263.14 | E$263.14 36.51,70.8
S$230
  Top 0.406: E$274.1 E$275.1 42.23,65.41 41.59,66.04 E$263.10
S$231
  Top 0.305: E$223.6 27.06,45.33 27.3,45.09 E$226.1 | E$226.1
S$232  (via drill 0.5)
  Top 0.406: E$269.1 E$268.2 | E$263.3 39.05,66.67 37.47,68.26 v36.51,68.26 | v36.51,72.07 E$268.2 | E$268.2 E$267.2 E$266.2
  Bottom 0.406: v36.51,68.26 v36.51,72.07
S$233  (via drill 0.5)
  Top 0.406: E$263.12 v39.05,71.75
  Bottom 0.406: E$53.6 25.68,79.09 29.53,75.25 35.56,75.25 v39.05,71.75
S$234
  Top 0.305: E$276.2 33.34,58.74 32.36,57.76 32.38,54.93 31.75,54.29 25.4,54.29 25.11,54 E$223.14
  Top 0.406: E$277.2 E$276.2
S$235
  Top 0.305: E$225.1 29.21,45.09 28.89,45.4 27.94,45.4 27.71,45.63 E$223.7 27.71,48.35 28.44,49.08 E$7.1 | E$225.1
S$236
  Top 0.61: E$78.8 71.75,13.97 71.12,13.65 70.48,13.97 E$78.7
  Top 1.676: 71.12,13.65 71.12,6.99 E$50.4
  Bottom 0.813: E$71.C 72.39,5.76 E$50.4
S$240
  Top 0.406: E$86.1 E$68.5 | E$68.5
S$241
  Top 0.406: E$68.3 E$87.1
S$242
  Top 0.406: E$88.1 75.25,68.9 E$68.1
S$243
  Top 0.406: E$67.7 E$89.1 | E$89.1
S$244
  Top 0.406: E$90.1 E$67.5 | E$67.5
S$245
  Top 0.406: E$67.3 E$91.1 | E$91.1
S$246
  Top 0.406: E$92.1 E$67.1 | E$67.1
SCL  (via drill 0.5)
  Top 0.406: v24.77,48.58 25.11,48.23 E$223.3 | v82.87,46.04 E$62.12
  Bottom 0.406: 24.77,46.04 18.1,46.04 17.46,46.67 17.46,50.16 16.19,51.44 4.13,51.44 3.49,50.8 E$20.14 | 24.77,46.04 v24.77,48.58 | 24.77,46.04 v82.87,46.04
SDA  (via drill 0.5)
  Top 0.406: E$223.2 24.46,46.02 v24.45,45.09 | v84.14,45.09 E$62.13
  Bottom 0.406: v84.14,45.09 v24.45,45.09 17.46,45.09 16.19,46.35 16.19,48.58 15.24,49.53 E$20.13
VCC  (via drill 0.5)
  Top 0.305: v20.64,51.44 E$9.1 24.45,51.44 26.41,49.47 E$223.5 26.41,45.46 26.04,45.09 26.04,42.23 26.35,41.91 E$226.2 E$225.2 E$224.2 | E$219.3 E$219.4 | E$219.4 v57.47,56.2 | E$219.4 58.71,53.69 E$220.2 E$221.2
  Top 0.406: E$227.4 9.84,61.91 10.16,61.59 E$243.1 11.11,60.64 11.75,60.01 v11.75,56.2 | E$245.4 25.08,61.91 25.4,61.59 E$261.1 26.35,60.64 26.99,60.01 v26.99,56.2 | E$169.4 55.56,61.91 55.88,61.59 E$185.1 56.83,60.64 57.47,60.01 v57.47,56.2 | E$263.4 40.32,61.91 40.64,61.59 E$279.1 41.59,60.64 42.23,60.01 v42.23,56.2 | v20.64,53.98 v20.64,56.2 | v62.23,53.34 E$221.2 | E$84.2 88.58,60.33 88.27,60.64 E$67.15 88.27,63.82 87.95,64.14 82.23,64.14 81.92,63.82 E$67.10 81.92,60.33 81.28,59.69 74.61,59.69 73.98,60.33 E$68.15 73.98,63.82 73.66,64.14 67.94,64.14 67.63,63.82 E$68.10 v67.63,60.64 E$83.2 | E$66.1 E$64.1 E$65.1 88.58,46.99 87.95,47.62 v79.06,47.62 79.06,46.04 79.06,45.09 E$62.9 v79.06,37.78 79.38,37.47 E$69.1 E$70.1
  Top 0.61: v20.64,51.44 19.37,51.44 14.92,46.99 8.57,46.99 8.26,46.99 E$20.11 E$20.12
  Bottom 0.406: v11.75,56.2 v20.64,56.2 v26.99,56.2 v42.23,56.2 v57.47,56.2 | v20.64,51.44 v20.64,53.98 | v62.23,53.34 67.63,53.34 | 67.63,53.34 67.63,48.26 68.26,47.62 v79.06,47.62 | v67.63,60.64 67.63,53.34

## Text on the board
tDocu: Inputs | RTD1 | RTD2 | RTD3 | RTD4 | 1 | 2 | 3 | 4 | 5 | 6 | 7 | 8 | GND | PWM1 | PWM2 | PWM3 | PWM4 | POWER | 1 | 2 | 3 | 4 | 5 | 6 | 7 | 8